# Altium PCB OrangePi_Zero2.PcbDoc
Units mm, origin at the board's own origin, x right, y up, seen from the top; angles counter-clockwise.
Board outline 52.9 x 59.89 mm, 2 copper layers (Top Layer 1, Bottom Layer 1), stack 0.87 mm thick; 2 components, 3 nets, 43 pads, 0 vias.
Unrouted connection lines stored in the file: 7.
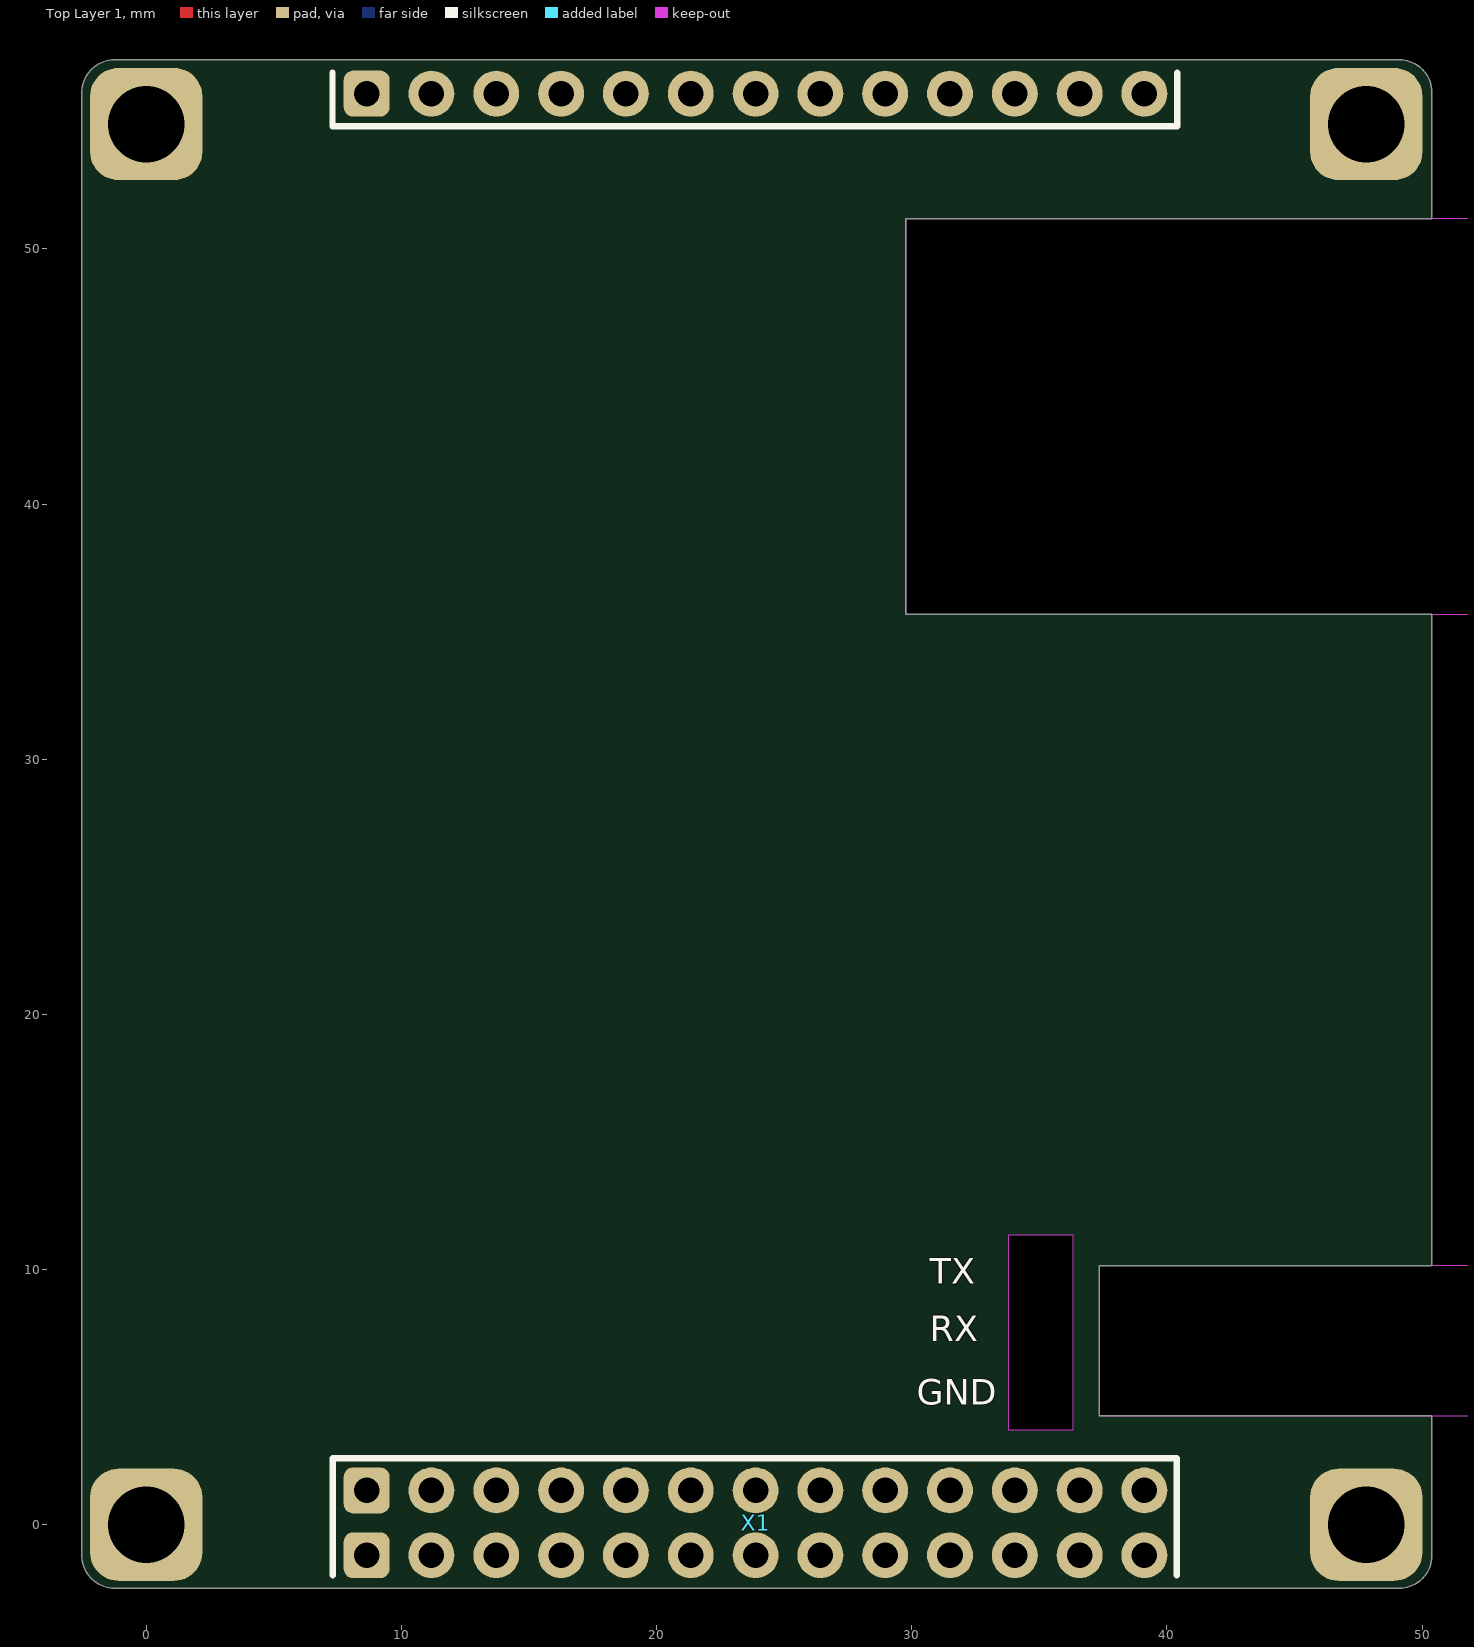
[diagram p0: Top Layer 1 view]
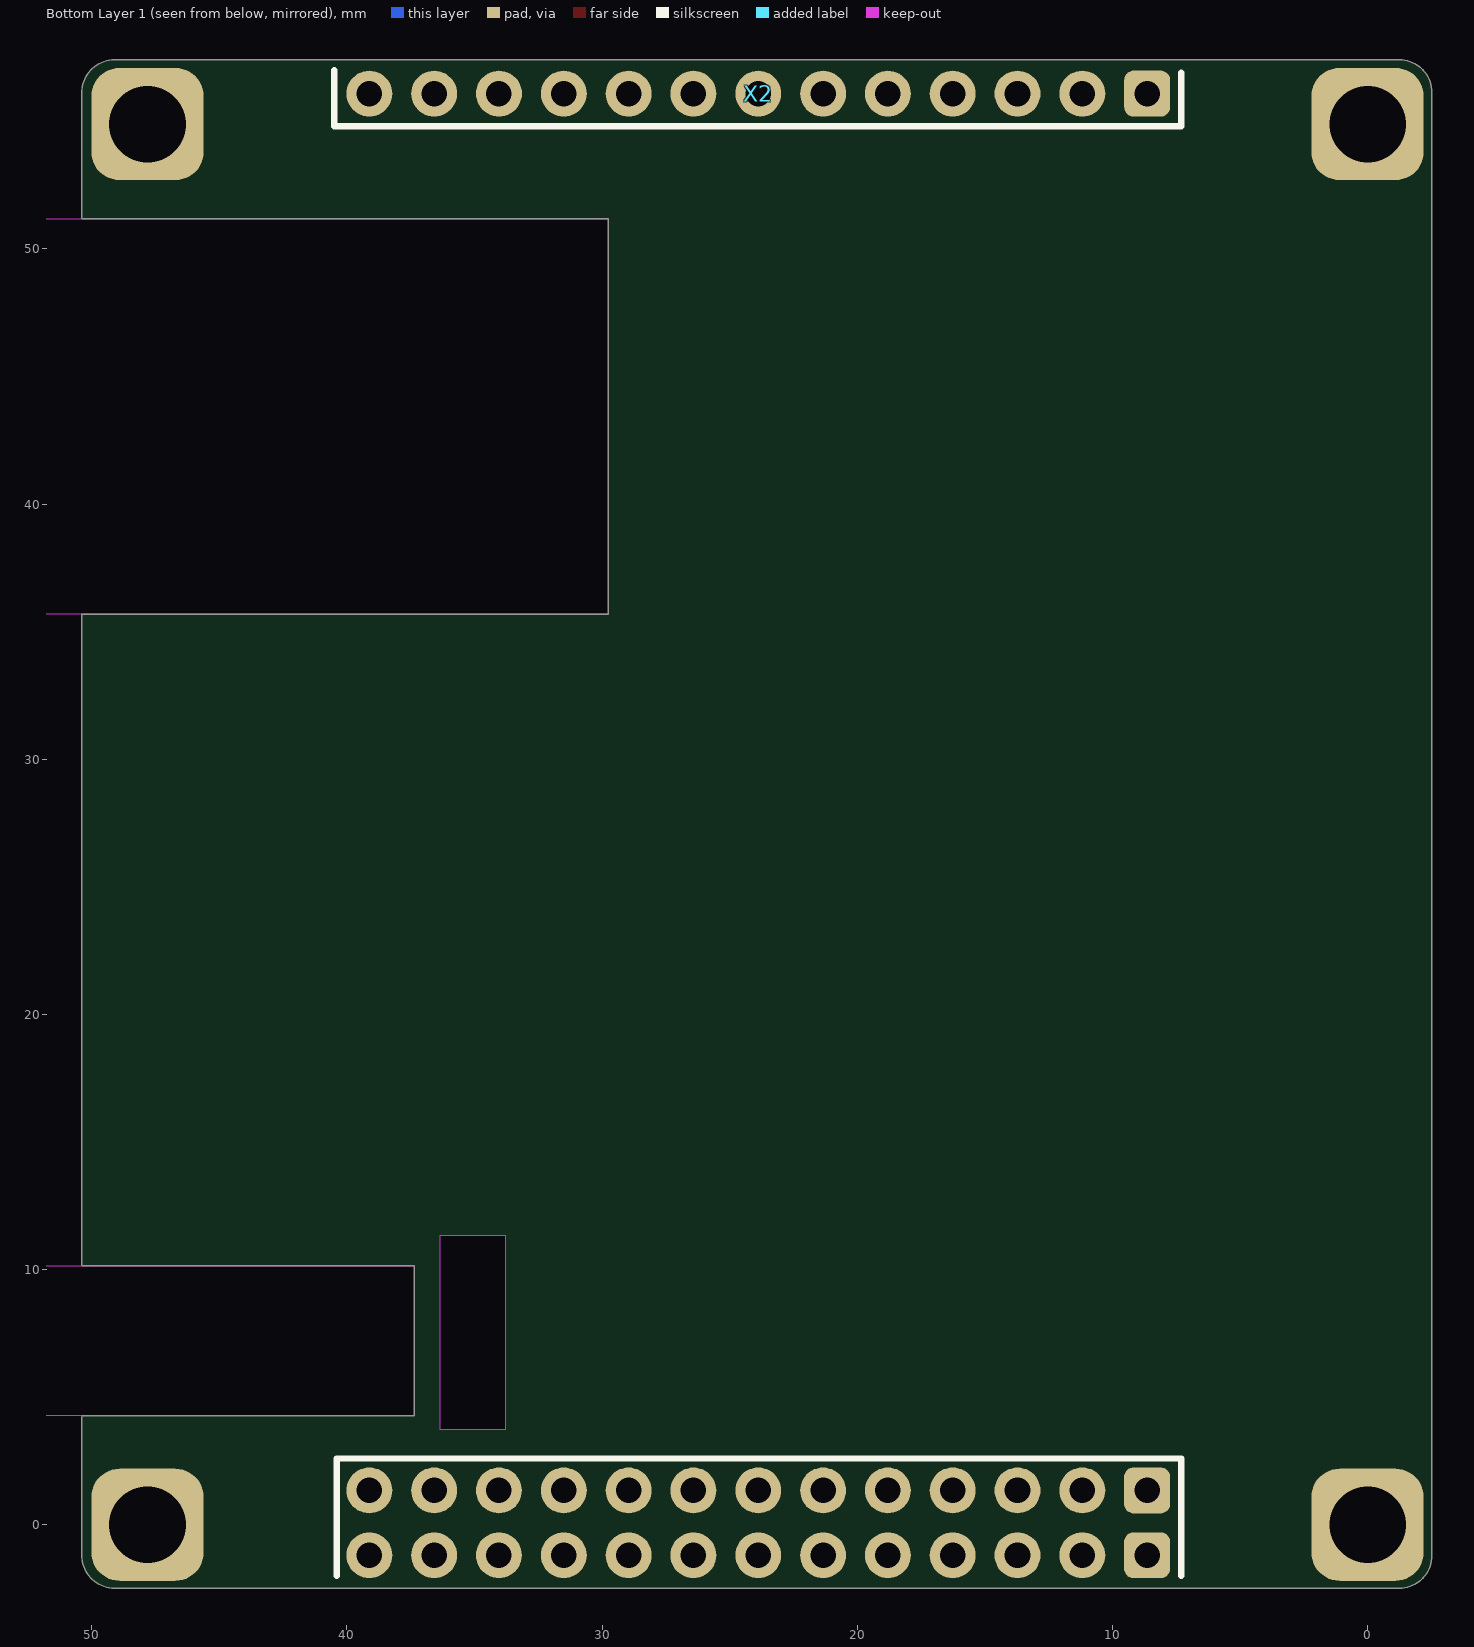
[diagram p1: Bottom Layer 1 view, seen from below]

## Layer stack, top to bottom
Top Solder: solder mask 0.01, Solder Resist, Dk 3.5
Top Layer 1: signal copper 0.035
Dielectric 1: dielectric 0.8, FR-4, Dk 4.8
Bottom Layer 1: signal copper 0.035
Bottom Solder: solder mask 0.01, Solder Resist, Dk 3.5

## Board outline
-2.521,-1.212 ccw(c-1.251,-1.212) -1.251,-2.482 49.113,-2.482 ccw(c49.113,-1.212) 50.383,-1.212 50.383,4.241 50.35,4.274 37.354,4.274 37.354,10.144 50.35,10.144 50.383,10.177 50.383,35.675 29.764,35.675 29.764,51.185 50.375,51.185 50.383,51.193 50.383,56.136 ccw(c49.113,56.136) 49.113,57.406 -1.251,57.406 ccw(c-1.251,56.136) -2.521,56.136
cut-out: 36.33,11.339 33.79,11.339 33.79,3.719 36.33,3.719
cut-out: 37.354,10.144 37.354,4.274 52,4.274 52,10.144
cut-out: 52,51.185 29.764,51.185 29.764,35.691 52,35.691

## Design rules (kind name [scope] priority, off if disabled: settings)
BoardOutlineClearance BoardOutlineClearanceNetClassHighVoltage [InNetClass('HighVoltage')] p1: gap=1 ignorepadtopadclearanceinfootprint=FALSE
BoardOutlineClearance BoardOutlineClearancePolyHighVoltage [isNamedPolygon('HighVoltage')] p2: gap=1 ignorepadtopadclearanceinfootprint=FALSE
BoardOutlineClearance [All] p3: gap=0.25 ignorepadtopadclearanceinfootprint=FALSE
Clearance BigHoleClearance [IsPad && HoleDiameter > 5] p1: gap=0.41 ignorepadtopadclearanceinfootprint=FALSE
Clearance KeepOutClearance [Keepout] p2: gap=0.2 ignorepadtopadclearanceinfootprint=FALSE
Clearance PolygonGNDClearanceAllLayers [InNamedPolygon('GND') or  InNet('GND')] p3: gap=0.155 ignorepadtopadclearanceinfootprint=FALSE
Clearance ACClearanceAllLayers [InNetClass('AC')] p4: gap=1 ignorepadtopadclearanceinfootprint=FALSE
Clearance PolygonClearanceAllLayers [All vs InPolygon] p5: gap=0.2 ignorepadtopadclearanceinfootprint=FALSE
Clearance ClearanceInternalLayers [All vs OnMid] p6: gap=0.155 ignorepadtopadclearanceinfootprint=FALSE
Clearance ClearanceTopBottomLayers [All] p7: gap=0.155 ignorepadtopadclearanceinfootprint=FALSE
ComponentClearance [All] p1: gap=0.15 collisioncheckmode=3 verticalgap=0.15 showdistances=FALSE
DiffPairsRouting [All] p1: maxlimit=2 minlimit=0.15 mostfreqgap=0.15 toplayer_minwidth=0.15 toplayer_maxwidth=0.2 toplayer_prefwidth=0.15 bottomlayer_minwidth=0.15 bottomlayer_maxwidth=0.2 bottomlayer_prefwidth=0.15 maxuncoupledlength=12.7
Height [All] p1: minheight=0 maxheight=50 prefheight=12.7
HoleSize [All] p1: absolutevalues=TRUE maxlimit=10 minlimit=0.2 maxpercent=80.000 minpercent=20.000
HoleToHoleClearance [All] p1: gap=0.2 allowstackedmicrovias=TRUE
MatchedLengths [InDifferentialPairClass('All Differential Pairs')] p1: tolerance=0.3 checknetsindiffpair=TRUE checkdiffpairvsdiffpair=FALSE checkxsignals=FALSE checkothers=FALSE
MinimumAnnularRing [All] p1: minimumring=0.1
MinimumSolderMaskSliver [All] p1: minsoldermaskwidth=0.05
PlaneClearance [All] p1: clearance=1.2
PolygonConnect PolygonConnect_1 [Not InNet('EGND')] p1: connectstyle=Direct reliefconductorwidth=0.254 reliefentries=4 polygonreliefangle="90 Angle" airgapwidth=0.254
PolygonConnect [InNet('EGND')] p2: thpad.connectstyle=Relief thpad.reliefconductorwidth=0.3 thpad.reliefentries=4 thpad.polygonreliefangle="90 Angle" thpad.airgapwidth=0.25 smdpad.connectstyle=Relief smdpad.reliefconductorwidth=0.3 smdpad.reliefentries=4 smdpad.polygonreliefangle="90 Angle" smdpad.airgapwidth=0.2 via.connectstyle=Direct via.reliefconductorwidth=0.3 via.reliefentries=4 via.polygonreliefangle="90 Angle" via.airgapwidth=0.25
RoutingVias [All] p1: holewidth=0.3 width=0.6 viastyle="Through Hole" minholewidth=0.3 minwidth=0.6 maxholewidth=1 maxwidth=2
SilkToSilkClearance [All] p1: silktosilkclearance=0.01
SilkToSolderMaskClearance [IsPad] p1: minsilkscreentomaskgap=0.01 clearancetoexposedcopper=TRUE
SolderMaskExpansion ViaSolderMaskExpansion [IsVia] p1: expansion=0.102 istentingtop=TRUE
SolderMaskExpansion [All] p2: expansion=0.05 istentingtop=FALSE
ViasUnderSMD [All] p1: allowed=TRUE
Width WidthInternalLayers [OnMid] p1: maxlimit=8 minlimit=0.155 preferedwidth=0.25
Width WidthTopBottomLayers [OnTopLayer Or OnBottomLayer] p2: maxlimit=8 minlimit=0.155 preferedwidth=0.25
21 further rules are at their usual default settings.

## Components (designator, comment, footprint, x,y, rotation, side; value= is the part's Value field where it differs from the comment)
X1 "Orange Pi 26 Pin_1" "26pin Orange Pi Bottom" 23.878,0.075 r90 top locked
X2 "Orange Pi 13 Pin" "13pin Orange Pi" 23.878,56.085 r0 bottom locked

## Footprints (in the part's own frame and the unit in brackets; to place one, negate y for a bottom-side part, rotate by r counter-clockwise, add the part's x,y. Pads: shape width x height; smd on the part's side, far side on the other; paste and mask are expansions set on the pad)
"13pin Orange Pi" [mm]
  rrect40% 1.8x1.8 hole 1: 1(-15.24,0)
  round 1.8 hole 1: 2(-12.7,0) 3(-10.16,0) 4(-7.62,0) 5(-5.08,0) 6(-2.54,0) 7(0,0) 8(2.54,0) 9(5.08,0) 10(7.62,0) 11(10.16,0) 12(12.7,0) 13(15.24,0)
  silkscreen extent -16.58,-0.81 16.62,1.27, body extent -16.51,-1.78 16.51,1.78, height 8.68
"26pin Orange Pi Bottom" [mm]
  rrect40% 1.8x1.8 hole 1: 1(-1.27,15.24) 2(1.27,15.24)
  round 1.8 hole 1: 3(-1.27,12.7) 4(1.27,12.7) 5(-1.27,10.16) 6(1.27,10.16) 7(-1.27,7.62) 8(1.27,7.62) 9(-1.27,5.08) 10(1.27,5.08) 11(-1.27,2.54) 12(1.27,2.54) 13(-1.27,0) 14(1.27,0) 15(-1.27,-2.54) 16(1.27,-2.54) 17(-1.27,-5.08) 18(1.27,-5.08) 19(-1.27,-7.62) 20(1.27,-7.62) 21(-1.27,-10.16) 22(1.27,-10.16) 23(-1.27,-12.7) 24(1.27,-12.7) 25(-1.27,-15.24) 26(1.27,-15.24)
  silkscreen extent -2.05,-16.51 2.54,16.56, body extent -2.53,-16.51 2.53,16.51, height 2.5

## Free pads (board coordinates)
  rrect50% 4.4x4.4 hole 3: 5(0,0) 5(0,54.892) 5(47.812,0) 5(47.812,54.892)

## Nets (pads, with @x,y where several pads share a name; then routed paths per layer and width w, separated by ;. In a path a pad name is that pad's centre, name@x,y a point inside that pad or via, vN(x,y) a via of type N, cw(c..) or ccw(c..) an arc to the next point about the centre after c; other vN are vias at no path point)
+3.3: X1.1 X1.17
+5: X1.2 X1.4 X2.13
GND: X1.6 X1.9 X1.20 X1.25 X2.12
pads on no net: X1.3 X1.5 X1.7 X1.8 X1.10 X1.11 X1.12 X1.13 X1.14 X1.15 X1.16 X1.18 X1.19 X1.21 X1.22 X1.23 X1.24 X1.26 X2.1 X2.2 X2.3 X2.4 X2.5 X2.6 X2.7 X2.8 X2.9 X2.10 X2.11

## Silkscreen, mask and mechanical layers (free items; w line width, h text height)
Top Overlay:
  lines w0.25: 7.3,56.9 7.3,54.8 40.4,54.8 40.4,56.9
  text "TX" at 30.7,9.45 h1
  text "RX" at 30.7,7.2 h1
  text "GND" at 30.2,4.7 h1
Bottom Overlay:
  lines w0.25: 7.3,-2 7.3,2.6 40.4,2.6 40.4,-2 ; 40.5,54.8 40.5,57
Mechanical 1:
  lines w0.013: 13.979,36.887 14.979,36.887 ; 14.479,36.387 14.479,37.387 ; -1390.821,-1106.113 -1389.821,-1106.113 -1390.821,-1106.113 ; -1390.321,-1106.613 -1390.321,-1105.613 -1390.321,-1106.613
Top ComponentsContours:
  drawing of 313 lines, arcs and shapes, not listed
PCB Contour:
  lines w0.1: 50.35,4.274 37.354,4.274 37.354,10.144 50.35,10.144 ; 50.375,51.185 29.764,51.185 29.764,35.675 50.383,35.675 50.383,10.177 ; 50.383,4.241 50.383,-1.212 cw(c49.113,-1.212) 49.113,-2.482 -1.251,-2.482 cw(c-1.251,-1.212) -2.521,-1.212 -2.521,56.136 cw(c-1.251,56.136) -1.251,57.406 39.383,57.406 49.113,57.406 cw(c49.113,56.136) 50.383,56.136 50.383,51.193 ; 33.775,3.725 36.35,3.725 36.35,11.35 33.775,11.35 33.775,3.725